# Altium PCB PCB-trb01-V2.30 - 2.PcbDoc (part 1 of 2)
Units mil, origin at the board's own origin, x right, y up, seen from the top; angles counter-clockwise.
Board outline 4312.6 x 590.55 mil, 4 copper layers (Top, GND, POWER, Bottom), stack 35.4 mil thick; 297 components, 117 nets, 641 pads, 0 vias.
Unrouted connection lines stored in the file: 1.
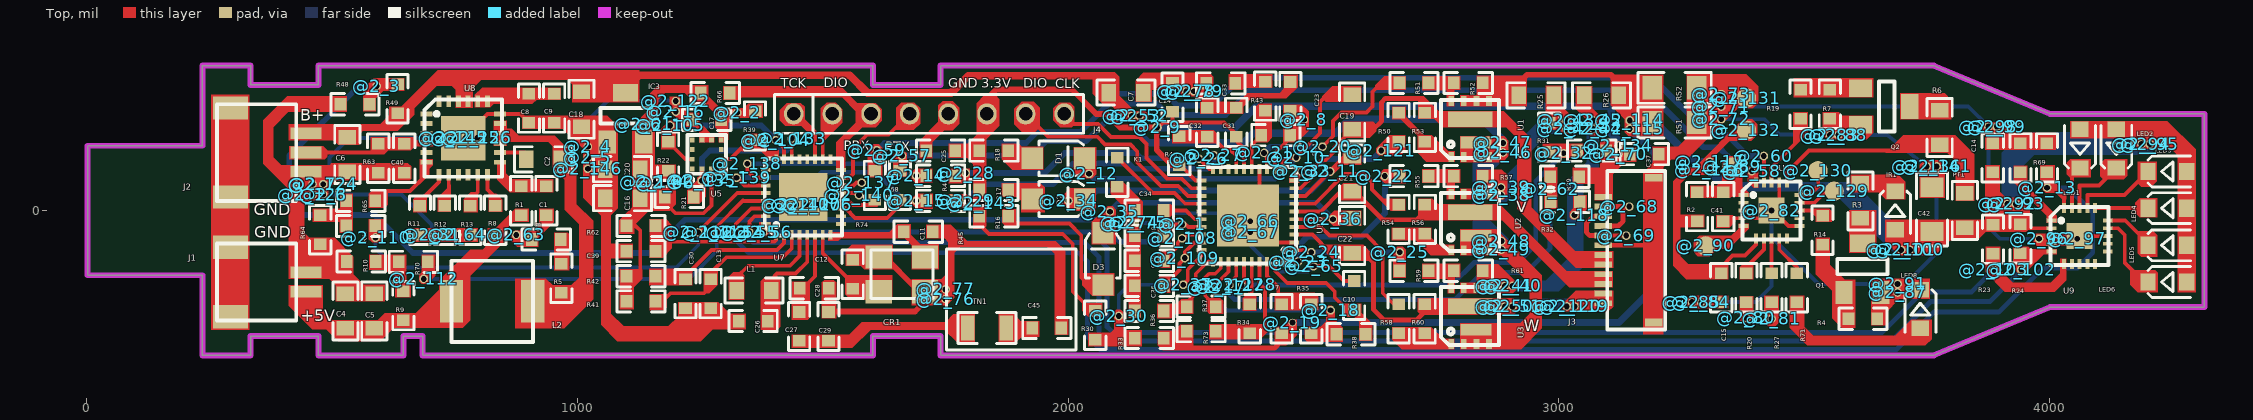
[diagram p0: Top view]
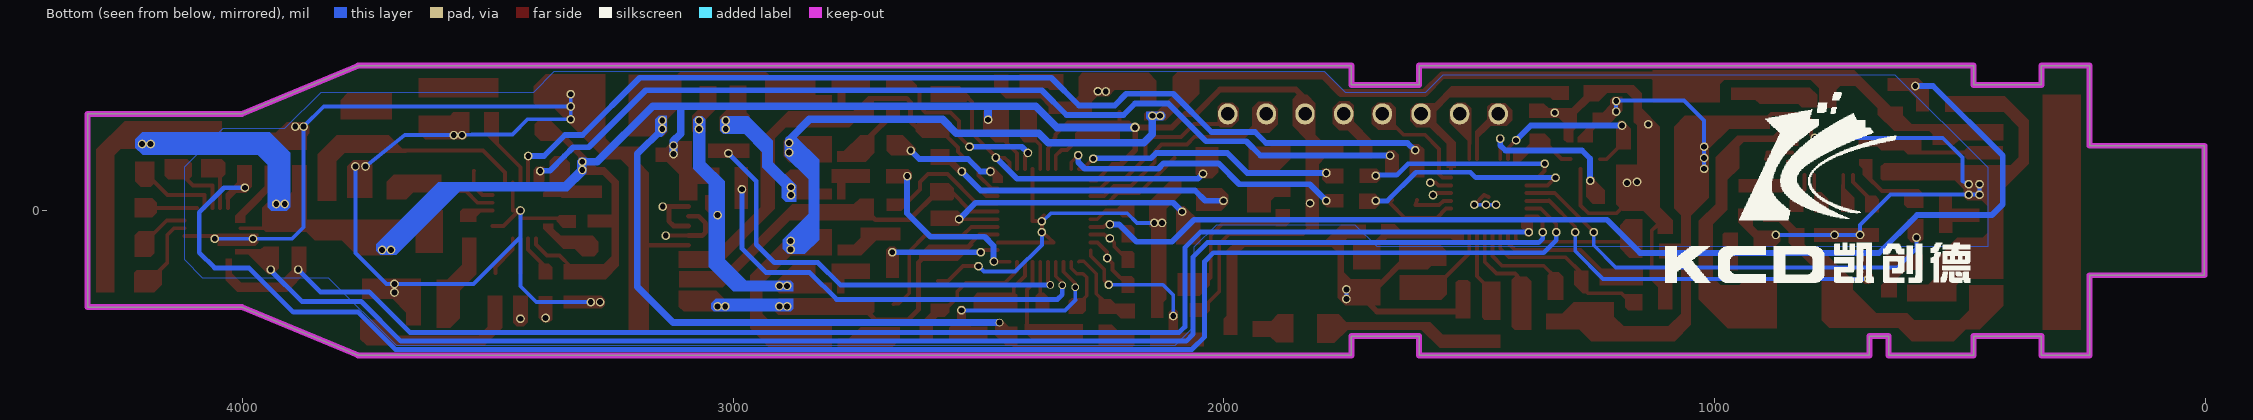
[diagram p1: Bottom view, seen from below]
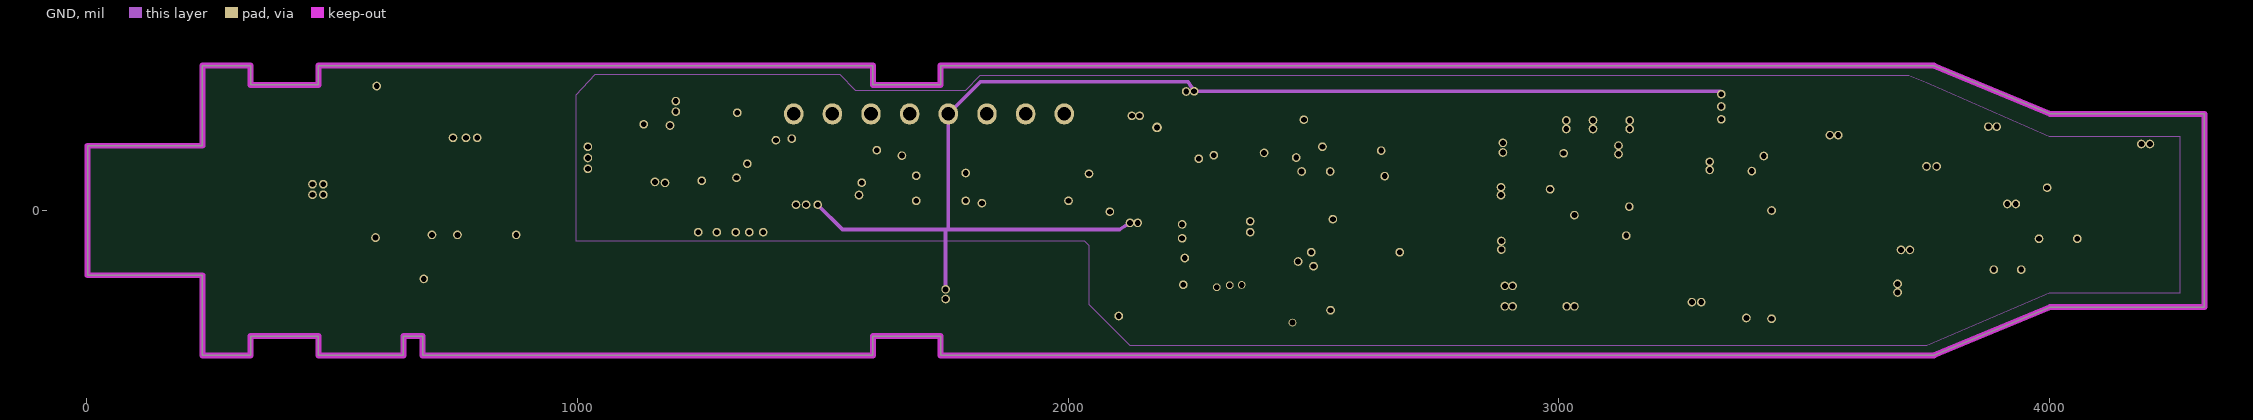
[diagram p2: GND]
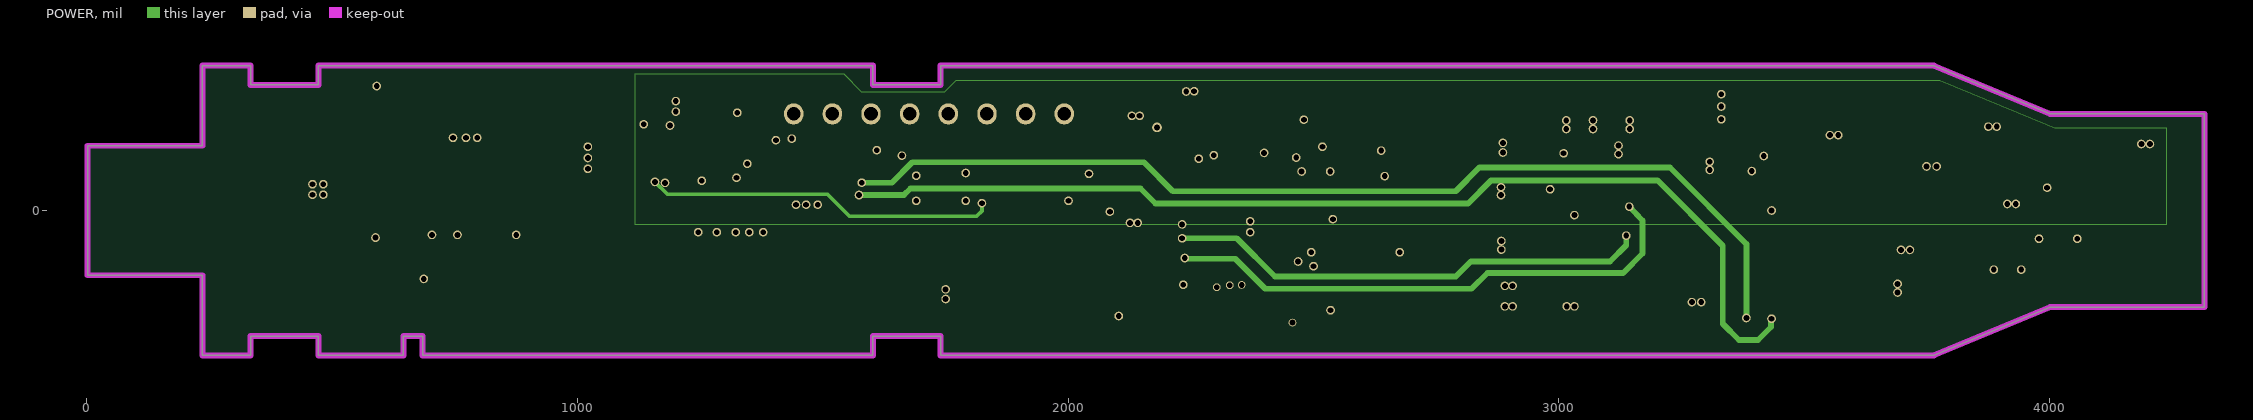
[diagram p3: POWER]

## Layer stack, top to bottom
Solder Mask Top: solder mask 0.4, Solder Resist, Dk 3.5
Top: signal copper 1.35
Dielectric 1: dielectric 10, FR-4, Dk 4.3
GND: signal copper 1.35
Dielectric2: dielectric 10, FR-4, Dk 4.3
POWER: signal copper 1.35
Dielectric3: dielectric 10, FR-4, Dk 4.3
Bottom: signal copper 1.35
Solder Mask Bottom: solder mask 0.4, Solder Resist, Dk 3.5

## Board outline
2.36,131.89 2.36,-131.89 236.22,-131.89 236.22,-295.28 334.65,-295.28 334.65,-255.91 472.44,-255.91 472.44,-295.28 645.67,-295.28 645.67,-255.91 685.04,-255.91 685.04,-295.28 1602.36,-295.28 1602.36,-255.91 1740.16,-255.91 1740.16,-295.28 3763.78,-295.28 4000,-196.85 4314.96,-196.85 4314.96,196.85 4000,196.85 3763.78,295.28 1740.16,295.28 1740.16,255.91 1602.36,255.91 1602.36,295.28 472.44,295.28 472.44,255.91 334.65,255.91 334.65,295.28 236.22,295.28 236.22,131.89

## Design rules (kind name [scope] priority, off if disabled: settings)
Clearance "Clearance - Default - DEFAULT - Via" [IsVia vs IsVia] p1: gap=7.87 ignorepadtopadclearanceinfootprint=FALSE
Clearance "Clearance - Default - DEFAULT- SMD" [IsVia vs IsSMTPin] p2: gap=7.87 ignorepadtopadclearanceinfootprint=FALSE
Clearance "Clearance - Default - DEFAULT - Net" [All] p3: gap=11.81 ignorepadtopadclearanceinfootprint=FALSE except(0: Arc-Hole Track-Hole SMDPad-Hole THPad-Hole Via-Hole Fill-Hole Poly-Hole Region-Hole Text-Hole; 10: Text-Text)
ComponentClearance "ComponentClearance - Default - DEFAULT" [All] p1: gap=6 collisioncheckmode=3 verticalgap=10 showdistances=FALSE
FanoutControl Fanout_SOIC [IsSOIC] p1: bgadir=Out bgaviamode=Centered fanoutstyle=Auto fanoutdirection=Alternating viagrid=1 // Fanout_SOIC (Default Rule)
FanoutControl Fanout_Small [(CompPinCount < 5)] p2: bgadir=Out bgaviamode=Centered fanoutstyle=Auto fanoutdirection=OutThenIn viagrid=1 // Fanout_Small (Default Rule)
FanoutControl Fanout_LCC [IsLCC] p3: bgadir=Out bgaviamode=Centered fanoutstyle=Auto fanoutdirection=Alternating viagrid=1 // Fanout_LCC (Default Rule)
FanoutControl Fanout_BGA [IsBGA] p4: bgadir=Out bgaviamode=Centered fanoutstyle=Auto fanoutdirection=Alternating viagrid=1 // Fanout_BGA (Default Rule)
HoleToHoleClearance "HoleToHoleClearance - Default - DEFAULT" [All] p1: gap=6 allowstackedmicrovias=TRUE
Length "Default Length" [All] p1: maxlimit=50000 minlimit=0
MaxMinImpedance "Default Impedance" [All] p1: minimum=50.00 maximum=150.0
ParallelSegment "Default Parallel Segment Same Layer" [All] p1: limit=1000 gap=200
ParallelSegment "Default Parallel Segment Adjasent" [All] p2: limit=1000 gap=200
RoutingLayers "RoutingLayers - Default - DEFAULT" [All] p1: top layer_v5=TRUE mid layer 1_v5=TRUE mid layer 2_v5=TRUE bottom layer_v5=TRUE
RoutingPriority "RoutingPriority - Default - DEFAULT" [All] p1: routingpriority=3
RoutingTopology "Default Routing Topology" [All] p1: topology=Shortest
RoutingVias "RoutingVias - Default - DEFAULT" [All] p1: holewidth=37 width=55 viastyle="Through Hole" minholewidth=37 minwidth=55 maxholewidth=37 maxwidth=55
SMDToCorner "SMDToCorner - Default - DEFAULT" [All] p1: distance=78740
SolderMaskExpansion [All] p1: expansion=4 istentingtop=FALSE
Width "Default Width" [All] p1: maxlimit=59.06 minlimit=5.91 preferedwidth=7.87
18 further rules are at their usual default settings.

## Components (designator, comment, footprint, x,y, rotation, side; value= is the part's Value field where it differs from the comment)
@2_1 "FPAD_2DABAABA" FPAD_2DABAABA 2232.28,-28.35 r180 top
@2_2 "FPAD_2DABAAA" FPAD_2DABAAA 1325.98,199.21 r180 top
@2_3 "FPAD_2DABAAA" FPAD_2DABAAA 591.34,253.54 r180 top
@2_4 "FPAD_2DABAAA" FPAD_2DABAAA 1021.65,129.92 r180 top
@2_5 "FPAD_2DABAAA" FPAD_2DABAAA 1021.65,107.09 r180 top
@2_6 "FPAD_2DABAAA" FPAD_2DABAAA 482.68,32.28 r180 top
@2_7 "FPAD_2DABAAA" FPAD_2DABAAA 460.63,53.54 r180 top
@2_8 "FPAD_2DABAABA" FPAD_2DABAABA 2480.32,185.04 r180 top
@2_9 "FPAD_2DABAABAC" FPAD_2DABAABAC 2181.1,169.29 r180 top
@2_10 "FPAD_2DABAABA" FPAD_2DABAABA 2464.57,107.87 r180 top
@2_11 "FPAD_2DABAABA" FPAD_2DABAABA 2533.86,79.53 r180 top
@2_12 "FPAD_2DABAABA" FPAD_2DABAABA 2042.52,74.8 r180 top
@2_13 "FPAD_2DABAABA" FPAD_2DABAABA 3994.49,46.46 r180 top
@2_14 "FPAD_2DABAAA" FPAD_2DABAAA 1690.55,70.87 r180 top
@2_15 "FPAD_2DABAAA" FPAD_2DABAAA 1690.55,19.68 r180 top
@2_16 "FPAD_2DABAAA" FPAD_2DABAAA 1200.79,201.57 r180 top
@2_17 "FPAD_2DABAABAA" FPAD_2DABAABAA 2302.76,-156.3 r180 top
@2_18 "FPAD_2DABAABA" FPAD_2DABAABA 2534.65,-203.15 r180 top
@2_19 "FPAD_2DABAABAA" FPAD_2DABAABAA 2457.09,-228.35 r180 top
@2_20 "FPAD_2DABAABA" FPAD_2DABAABA 2518.11,129.92 r180 top
@2_21 "FPAD_2DABAABA" FPAD_2DABAABA 2399.21,117.32 r180 top
@2_22 "FPAD_2DABAABA" FPAD_2DABAABA 2644.88,70.08 r180 top
@2_23 "FPAD_2DABAABA" FPAD_2DABAABA 2468.5,-103.94 r180 top
@2_24 "FPAD_2DABAABA" FPAD_2DABAABA 2495.28,-85.04 r180 top
@2_25 "FPAD_2DABAABA" FPAD_2DABAABA 2675.59,-85.04 r180 top
@2_26 "FPAD_2DABAABA" FPAD_2DABAABA 2266.14,105.51 r180 top
@2_27 "FPAD_2DABAABA" FPAD_2DABAABA 2296.85,112.6 r180 top
@2_28 "FPAD_2DABAAA" FPAD_2DABAAA 1791.34,76.38 r180 top
@2_29 "FPAD_2DABAAA" FPAD_2DABAAA 1791.34,19.68 r180 top
@2_30 "FPAD_2DABAABA" FPAD_2DABAABA 2103.15,-214.96 r180 top
@2_31 "FPAD_2DABAAA" FPAD_2DABAAA 703.94,-49.61 r180 top
@2_32 "FPAD_2DABAABA" FPAD_2DABAABA 3009.45,116.54 r180 top
@2_33 "FPAD_2DABAABA" FPAD_2DABAABA 2475.59,79.53 r180 top
@2_34 "FPAD_2DABAABA" FPAD_2DABAABA 2000.79,19.68 r180 top
@2_35 "FPAD_2DABAABA" FPAD_2DABAABA 2085.04,-2.36 r180 top
@2_36 "FPAD_2DABAABA" FPAD_2DABAABA 2539.37,-17.72 r180 top
@2_37 "FPAD_2DABAABA" FPAD_2DABAABA 2234.65,-151.18 r180 top
@2_38 "FPAD_2DABAABA" FPAD_2DABAABA 2881.89,31.5 r180 top
@2_39 "FPAD_2DABAABA" FPAD_2DABAABA 2881.89,47.24 r180 top
@2_40 "FPAD_2DABAABA" FPAD_2DABAABA 2905.51,-153.54 r180 top
@2_41 "FPAD_2DABAABA" FPAD_2DABAABA 2889.76,-153.54 r180 top
@2_42 "FPAD_2DABAABA" FPAD_2DABAABA 3014.96,166.14 r180 top
@2_43 "FPAD_2DABAABA" FPAD_2DABAABA 3014.96,183.46 r180 top
@2_44 "FPAD_2DABAABA" FPAD_2DABAABA 3069.29,166.14 r180 top
@2_45 "FPAD_2DABAABA" FPAD_2DABAABA 3069.29,183.46 r180 top
@2_46 "FPAD_2DABAABA" FPAD_2DABAABA 2885.83,118.11 r180 top
@2_47 "FPAD_2DABAABA" FPAD_2DABAABA 2885.83,137.8 r180 top
@2_48 "FPAD_2DABAABA" FPAD_2DABAABA 2882.68,-62.2 r180 top
@2_49 "FPAD_2DABAABA" FPAD_2DABAABA 2882.68,-79.53 r180 top
@2_50 "FPAD_2DABAABA" FPAD_2DABAABA 2889.76,-195.28 r180 top
@2_51 "FPAD_2DABAABA" FPAD_2DABAABA 2905.51,-195.28 r180 top
@2_52 "FPAD_2DABAABA" FPAD_2DABAABA 2145.67,192.91 r180 top
@2_53 "FPAD_2DABAABA" FPAD_2DABAABA 2129.92,192.91 r180 top
@2_54 "FPAD_2DABAAA" FPAD_2DABAAA 1322.83,-44.09 r180 top
@2_55 "FPAD_2DABAAA" FPAD_2DABAAA 1350.39,-44.09 r180 top
@2_56 "FPAD_2DABAAA" FPAD_2DABAAA 1378.74,-44.09 r180 top
@2_57 "FPAD_2DABAABA" FPAD_2DABAABA 1661.42,111.81 r180 top
@2_58 "FPAD_2DABAABA" FPAD_2DABAABA 3392.91,80.32 r180 top
@2_59 "FPAD_2DABAABA" FPAD_2DABAABA 1610.24,122.83 r180 top
@2_60 "FPAD_2DABAABA" FPAD_2DABAABA 3417.32,111.02 r180 top
@2_61 "FPAD_2DABAABA" FPAD_2DABAABA 1135.43,175.59 r180 top
@2_62 "FPAD_2DABAABA" FPAD_2DABAABA 2981.89,43.31 r180 top
@2_63 "FPAD_2DABAAA" FPAD_2DABAAA 875.59,-49.61 r180 top
@2_64 "FPAD_2DABAAA" FPAD_2DABAAA 755.91,-49.61 r180 top
@2_65 "FPAD_2DABAABA" FPAD_2DABAABA 2500,-113.39 r180 top
@2_66 "FPAD_2DABAABA" FPAD_2DABAABA 2370.87,-22.05 r180 top
@2_67 "FPAD_2DABAABA" FPAD_2DABAABA 2370.87,-44.09 r180 top
@2_68 "FPAD_2DABAABA" FPAD_2DABAABA 3143.31,7.87 r180 top
@2_69 "FPAD_2DABAABA" FPAD_2DABAABA 3137.01,-51.18 r180 top
@2_70 "FPAD_2DABAABA" FPAD_2DABAABA 3121.26,114.96 r180 top
@2_71 "FPAD_2DABAABA" FPAD_2DABAABA 3330.71,211.81 r180 top
@2_72 "FPAD_2DABAABA" FPAD_2DABAABA 3330.71,185.83 r180 top
@2_73 "FPAD_2DABAABA" FPAD_2DABAABA 3330.71,237.01 r180 top
@2_74 "FPAD_2DABAABA" FPAD_2DABAABA 2125.98,-25.2 r180 top
@2_75 "FPAD_2DABAABA" FPAD_2DABAABA 2141.73,-25.2 r180 top
@2_76 "FPAD_2DABAABA" FPAD_2DABAABA 1750.39,-180.32 r180 top
@2_77 "FPAD_2DABAABA" FPAD_2DABAABA 1750.39,-160.63 r180 top
@2_78 "FPAD_2DABAABA" FPAD_2DABAABA 2240.55,242.52 r180 top
@2_79 "FPAD_2DABAABA" FPAD_2DABAABA 2256.69,242.91 r180 top
@2_80 "FPAD_2DABAABA" FPAD_2DABAABA 3381.89,-218.9 r180 top
@2_81 "FPAD_2DABAABA" FPAD_2DABAABA 3433.07,-220.47 r180 top
@2_82 "FPAD_2DABAABA" FPAD_2DABAABA 3433.07,0 r180 top
@2_83 "FPAD_2DABAABA" FPAD_2DABAABA 3551.97,153.54 r180 top
@2_84 "FPAD_2DABAABA" FPAD_2DABAABA 3289.76,-186.61 r180 top
@2_85 "FPAD_2DABAABA" FPAD_2DABAABA 3270.87,-186.61 r180 top
@2_86 "FPAD_2DABAABA" FPAD_2DABAABA 1178.74,56.3 r180 top
@2_87 "FPAD_2DABAABA" FPAD_2DABAABA 3689.76,-166.93 r180 top
@2_88 "FPAD_2DABAABA" FPAD_2DABAABA 3568.9,153.54 r180 top
@2_89 "FPAD_2DABAABAB" FPAD_2DABAABAB 3352.76,88.98 r180 top
@2_90 "FPAD_2DABAABAB" FPAD_2DABAABAB 3298.82,-72.05 r180 top
@2_91 "FPAD_2DABAABA" FPAD_2DABAABA 3689.76,-149.61 r180 top
@2_92 "FPAD_2DABAABA" FPAD_2DABAABA 3913.39,13.39 r180 top
@2_93 "FPAD_2DABAABA" FPAD_2DABAABA 3930.71,13.39 r180 top
@2_94 "FPAD_2DABAABA" FPAD_2DABAABA 4186.61,135.43 r180 top
@2_95 "FPAD_2DABAABA" FPAD_2DABAABA 4203.94,135.43 r180 top
@2_96 "FPAD_2DABAABA" FPAD_2DABAABA 3977.95,-57.48 r180 top
@2_97 "FPAD_2DABAABA" FPAD_2DABAABA 4055.91,-57.48 r180 top
@2_98 "FPAD_2DABAABA" FPAD_2DABAABA 3874.8,170.87 r180 top
@2_99 "FPAD_2DABAABA" FPAD_2DABAABA 3891.73,170.87 r180 top
@2_100 "FPAD_2DABAABA" FPAD_2DABAABA 3714.96,-80.32 r180 top
@2_101 "FPAD_2DABAABA" FPAD_2DABAABA 3696.85,-80.32 r180 top
@2_102 "FPAD_2DABAABA" FPAD_2DABAABA 3941.73,-120.47 r180 top
@2_103 "FPAD_2DABAABA" FPAD_2DABAABA 3885.83,-120.47 r180 top
@2_104 "FPAD_2DABAABA" FPAD_2DABAABA 1404.72,143.31 r180 top
@2_105 "FPAD_2DABAABA" FPAD_2DABAABA 1188.98,173.23 r180 top
@2_106 "FPAD_2DABAABA" FPAD_2DABAABA 1489.76,11.81 r180 top
@2_107 "FPAD_2DABAABA" FPAD_2DABAABA 1466.14,11.81 r180 top
@2_108 "FPAD_2DABAABA" FPAD_2DABAABA 2232.28,-56.69 r180 top
@2_109 "FPAD_2DABAABA" FPAD_2DABAABA 2237.8,-96.85 r180 top
@2_110 "FPAD_2DABAAA" FPAD_2DABAAA 588.98,-55.12 r180 top
@2_111 "FPAD_2DABAAA" FPAD_2DABAAA 1246.46,-44.09 r180 top
@2_112 "FPAD_2DABAAA" FPAD_2DABAAA 687.4,-139.37 r180 top
@2_113 "FPAD_2DABAAA" FPAD_2DABAAA 1284.25,-44.09 r180 top
@2_114 "FPAD_2DABAABA" FPAD_2DABAABA 3144.09,183.46 r180 top
@2_115 "FPAD_2DABAABA" FPAD_2DABAABA 3144.09,166.14 r180 top
@2_116 "FPAD_2DABAABA" FPAD_2DABAABA 3307.09,82.68 r180 top
@2_117 "FPAD_2DABAABA" FPAD_2DABAABA 3307.09,99.21 r180 top
@2_118 "FPAD_2DABAABA" FPAD_2DABAABA 3031.5,-9.45 r180 top
@2_119 "FPAD_2DABAABA" FPAD_2DABAABA 3031.5,-195.28 r180 top
@2_120 "FPAD_2DABAABA" FPAD_2DABAABA 3015.75,-195.28 r180 top
@2_121 "FPAD_2DABAABA" FPAD_2DABAABA 2637.8,122.05 r180 top
@2_122 "FPAD_2DABAAA" FPAD_2DABAAA 1200.79,222.83 r180 top
@2_123 "FPAD_2DABAAA" FPAD_2DABAAA 460.63,32.28 r180 top
@2_124 "FPAD_2DABAAA" FPAD_2DABAAA 482.68,53.54 r180 top
@2_125 "FPAD_2DABAAA" FPAD_2DABAAA 773.23,148.03 r180 top
@2_126 "FPAD_2DABAAA" FPAD_2DABAAA 796.06,148.03 r180 top
@2_127 "FPAD_2DABAABAA" FPAD_2DABAABAA 2329.13,-152.36 r180 top
@2_128 "FPAD_2DABAABAA" FPAD_2DABAABAA 2353.54,-151.57 r180 top
@2_129 "FPAD_2DABAABAB" FPAD_2DABAABAB 3560.63,39.37 r180 top
@2_130 "FPAD_2DABAABAB" FPAD_2DABAABAB 3527.56,81.1 r180 top
@2_131 "FPAD_2DABAABAB" FPAD_2DABAABAB 3381.89,229.13 r180 top
@2_132 "FPAD_2DABAABAB" FPAD_2DABAABAB 3381.89,163.78 r180 top
@2_133 "FPAD_2DABAAA" FPAD_2DABAAA 1437.01,146.46 r180 top
@2_134 "FPAD_2DABAABA" FPAD_2DABAABA 3121.26,132.28 r180 top
@2_135 "FPAD_2DABAAA" FPAD_2DABAAA 1253.54,60.63 r180 top
@2_136 "FPAD_2DABAABA" FPAD_2DABAABA 3748.82,89.76 r180 top
@2_137 "FPAD_2DABAAA" FPAD_2DABAAA 1579.53,56.69 r180 top
@2_138 "FPAD_2DABAAA" FPAD_2DABAAA 1346.46,95.28 r180 top
@2_139 "FPAD_2DABAAA" FPAD_2DABAAA 1324.41,66.93 r180 top
@2_140 "FPAD_2DABAAA" FPAD_2DABAAA 1574.02,31.5 r180 top
@2_141 "FPAD_2DABAABA" FPAD_2DABAABA 3769.29,89.76 r180 top
@2_142 "FPAD_2DABAAA" FPAD_2DABAAA 1445.67,11.81 r180 top
@2_143 "FPAD_2DABAAA" FPAD_2DABAAA 1824.41,14.96 r180 top
@2_144 "FPAD_2DABAABA" FPAD_2DABAABA 1158.27,58.27 r180 top
@2_145 "FPAD_2DABAAA" FPAD_2DABAAA 746.85,148.03 r180 top
@2_146 "FPAD_2DABAAA" FPAD_2DABAAA 1021.65,85.04 r180 top
C1 "0402" 0402 937.01,19.68 r90 top
C2 "0603" 0603 931.1,104.33 r0 top
C3 "0402" 0402 937.01,-59.06 r0 top
C4 "0603" 0603 527.56,-204.72 r90 top
C5 "0603" 0603 586.61,-204.72 r90 top
C6 "0603" 0603 531.5,114.17 r270 top
C7 "0603" 0603 2118.11,240.16 r0 top
C8 "0402" 0402 901.57,208.66 r90 top
C9 "0402" 0402 952.76,208.66 r90 top
C10 "0402" 0402 2582.68,-173.23 r90 top
C11 "0402" 0402 1694.88,-43.31 r0 top
C12 "0402" 0402 1561.02,-129.92 r90 top
C13 "0402" 0402 1271.65,-169.29 r270 top
C14 "0402" 0402 3883.86,107.09 r270 top
C15 "0402" 0402 3330.71,-157.48 r270 top
C16 "0603" 0603 1092.52,25.2 r180 top
C17 "0402" 0402 1263.78,185.04 r180 top
C18 "0603" 0603 1008.66,206.3 r90 top
C19 "0603" 0603 2578.74,200.79 r270 top
C20 "0603" 0603 1092.52,84.25 r180 top
C21 "0603" 0603 2578.74,74.8 r270 top
C22 "0603" 0603 2578.74,-51.18 r270 top
C23 "0402" 0402 2452.76,232.28 r270 top
C24 "0402" 0402 2212.6,230.71 r270 top
C25 "0402" 0402 1740.16,122.05 r180 top
C26 "0402" 0402 1358.27,-225.2 r180 top
C27 "0402" 0402 1451.97,-236.22 r270 top
C28 "0402" 0402 1482.68,-158.27 r0 top
C29 "0402" 0402 1511.81,-236.22 r90 top
C30 "0402" 0402 1220.47,-169.29 r270 top
C31 "0402" 0402 2342.52,179.53 r270 top
C32 "0402" 0402 2283.46,179.53 r270 top
C33 "0402" 0402 2311.02,259.06 r0 top
C34 "0402" 0402 2165.35,0 r0 top
C35 "0402" 0402 2165.35,-102.36 r0 top
C36 "0402" 0402 2165.35,-153.54 r0 top
C37 "0402" 0402 3174.02,114.96 r0 top
C38 "0402" 0402 2165.35,-51.18 r180 top
C39 "0402" 0402 1129.92,-82.68 r180 top
C40 "0402" 0402 647.64,106.3 r90 top
C41 "0402" 0402 3334.65,7.87 r90 top
C42 "0805-2" 0805-2 3759.84,2.36 r90 top
C45 "0402" 0402 1956.69,-239.37 r0 top
CR1 "CRESTAL-24M-SMD" CRESTAL-24M-SMD 1661.42,-129.92 r0 top
D1 "SOD-323-S4" SOD-323-S4 1980.32,106.3 r180 top
D2 "SOD-323-S4" SOD-323-S4 1980.32,23.62 r180 top
D3 "SOD-323-S4" SOD-323-S4 2070.87,-98.43 r270 top
IC3 "SOT-23A" SOT-23A 1059.06,149.61 r0 top
IR1 "LED-1" LED-1 3685.04,0 r180 top
J1 "X1002WRS-2PIN" X1002WRS-2PIN 447.24,-145.67 r180 top
J2 "X1002WRS-3PIN" X1002WRS-3PIN 447.24,118.11 r180 top
J3 "FPC-05-09-12RLTAG" FPC-05-09-12RLTAG 3090.55,-80.71 r0 top
J4 "PIN2.0X8-S" PIN2.0X8-S 1716.54,196.85 r0 top
K1 "0402" 0402 2100,77.56 r90 top
L1 "0603" 0603 1359.84,-162.99 r0 top
L2 "INDUCTANCE-4X4-SMD" INDUCTANCE-4X4-SMD 826.77,-185.04 r180 top
LED1 "LED-1" LED-1 4061.42,125.98 r0 top
LED2 "LED-1" LED-1 4135.43,125.98 r0 top
LED3 "LED-1" LED-1 4239.37,79.53 r270 top
LED4 "LED-1" LED-1 4239.37,4.72 r270 top
LED5 "LED-1" LED-1 4239.37,-70.87 r270 top
LED6 "LED-1" LED-1 4239.37,-145.67 r270 top
LED8 "LED-1" LED-1 3736.22,-200.79 r180 top
PT1 "0603B" 0603B 3826.77,0 r90 top
Q1 "SOT-23" SOT-23 3578.74,-157.48 r0 top
Q2 "SOT-23" SOT-23 3624.41,251.18 r270 top
R1 "0402" 0402 885.83,19.68 r90 top
R2 "0402" 0402 3281.5,7.87 r90 top
R3 "0603" 0603 3614.17,19.68 r90 top
R4 "0402" 0402 3619.29,-220.47 r180 top
R5 "0402" 0402 967.72,-137.8 r270 top
R6 "0603" 0603 3775.59,169.29 r270 top
R7 "0402" 0402 3551.97,216.54 r270 top
R8 "0402" 0402 833.07,-19.68 r90 top
R9 "0402" 0402 645.67,-193.7 r90 top
R10 "0402" 0402 559.84,-103.94 r180 top
R11 "0402" 0402 679.53,-19.68 r90 top
R12 "0402" 0402 729.92,-19.68 r90 top
R13 "0402" 0402 781.89,-19.68 r90 top
R14 "0402" 0402 3537.01,-40.16 r270 top
R15 "0402" 0402 3940.16,107.09 r90 top
R16 "0402" 0402 1848.82,-11.81 r0 top
R17 "0402" 0402 1848.82,41.73 r0 top
R18 "0402" 0402 1848.82,122.05 r0 top
R19 "0402" 0402 3492.13,216.54 r90 top
R20 "0402" 0402 3381.89,-157.48 r90 top
R21 "0402" 0402 1207.87,27.56 r180 top
R22 "0402" 0402 1185.04,110.24 r270 top
R23 "0402" 0402 3884.25,-58.27 r90 top
R24 "0402" 0402 3940.16,-57.48 r90 top
R25 "0603" 0603 2953.54,234.65 r180 top
R26 "0603" 0603 3086.61,234.65 r0 top
R27 "0402" 0402 3433.07,-157.48 r90 top
R28 "0402" 0402 3066.93,122.05 r180 top
R29 "0402" 0402 3011.81,68.9 r180 top
R30 "0402" 0402 2055.12,-233.86 r270 top
R31 "0402" 0402 2980.32,149.61 r270 top
R32 "0402" 0402 3012.6,17.72 r180 top
R33 "0402" 0402 2165.35,-259.84 r180 top
R34 "0402" 0402 2370.08,-220.47 r90 top
R35 "0402" 0402 2495.28,-220.47 r90 top
R36 "0402" 0402 2165.35,-204.72 r180 top
R37 "0402" 0402 2270.87,-196.06 r0 top
R38 "0402" 0402 2576.38,-251.97 r0 top
R39 "0402" 0402 1362.2,172.44 r90 top
R40 "0402" 0402 2226.38,122.05 r90 top
R41 "0402" 0402 1129.92,-185.04 r0 top
R42 "0402" 0402 1129.92,-133.86 r0 top
R43 "0402" 0402 2401.57,233.07 r90 top
R44 "0402" 0402 2423.23,153.54 r180 top
R45 "0402" 0402 1740.16,19.68 r180 top
R46 "0402" 0402 1740.16,70.87 r180 top
R47 "0402" 0402 559.06,-31.5 r180 top
R48 "0402" 0402 547.24,216.54 r180 top
R49 "0402" 0402 633.86,227.56 r270 top
R50 "0402" 0402 2673.23,169.29 r270 top
R51 "0402" 0402 2704.72,259.84 r180 top
R52 "0402" 0402 2814.96,259.84 r180 top
R53 "0402" 0402 2726.77,169.29 r90 top
R54 "0402" 0402 2673.23,-18.11 r90 top
R55 "0402" 0402 2704.72,70.08 r180 top
R56 "0402" 0402 2726.77,-18.11 r270 top
R57 "0402" 0402 2814.96,70.08 r0 top
R58 "0402" 0402 2673.23,-220.47 r90 top
R59 "0402" 0402 2704.72,-122.83 r180 top
R60 "0402" 0402 2726.38,-220.47 r90 top
R61 "0402" 0402 2814.96,-122.83 r0 top
R62 "0402" 0402 1129.92,-31.5 r0 top
R63 "0402" 0402 594.49,106.3 r270 top
R64 "0402" 0402 476.38,-39.37 r90 top
R65 "0402" 0402 559.06,19.68 r0 top
R66 "0402" 0402 1281.1,239.37 r180 top
R67 "0402" 0402 2435.04,-220.47 r90 top
R68 "0402" 0402 1657.48,51.18 r90 top
R69 "0402" 0402 3994.09,107.09 r270 top
R70 "0402" 0402 666.14,-104.72 r0 top
R71 "0402" 0402 3484.25,-157.48 r90 top
R73 "0402" 0402 2270.87,-245.67 r0 top
R74 "0402" 0402 1606.3,51.18 r90 top
RS1 "0805-2" 0805-2 3235.43,179.13 r0 top
RS2 "0805-2" 0805-2 3235.43,250 r0 top
TN1 "0603A" 0603A 1834.65,-239.37 r0 top
U1 "DFN-8L-3X3-DOUB-MOS-INS" DFN-8L-3X3-DOUB-MOS-INS 2818.9,166.14 r90 top
U2 "DFN-8L-3X3-DOUB-MOS-INS" DFN-8L-3X3-DOUB-MOS-INS 2818.9,-23.62 r90 top
U3 "DFN-8L-3X3-DOUB-MOS-INS" DFN-8L-3X3-DOUB-MOS-INS 2818.9,-214.96 r90 top
U4 "QFN20L-3X3-P-INSIDEA" QFN20L-3X3-P-INSIDEA 3433.07,0 r0 top
U5 "LGA-12-2X2" LGA-12-2X2 1263.78,114.17 r90 top
U7 "QFN32-4X4-PIN-D-0.4" QFN32-4X4-PIN-D-0.4 1460.63,27.56 r90 top
U8 "QFN24-4X4-DPIN-0.5" QFN24-4X4-DPIN-0.5 767.72,147.64 r0 top
U9 "QFN20L-3X3-P-INSIDE" QFN20L-3X3-P-INSIDE 4060.63,-51.97 r0 top
U10 "QFN40-5X5-DPIN-0.4" QFN40-5X5-DPIN-0.4 2366.14,-9.84 r180 top

## Footprints (in the part's own frame and the unit in brackets; to place one, negate y for a bottom-side part, rotate by r counter-clockwise, add the part's x,y. Pads: shape width x height; smd on the part's side, far side on the other; paste and mask are expansions set on the pad)
0402 [mm]
  rect 0.6x0.65 smd: 1(-0.75,0) 2(0.75,0)
  silkscreen extent -1.25,-0.55 1.25,0.55
0603 [mm]
  rect 0.75x0.9 smd: 1(-0.9,0) 2(0.9,0)
  silkscreen extent -1.5,-0.65 1.5,0.65
0603A [mm]
  rect 0.7x1.3 smd: 1(-1,0) 2(1,0)
  silkscreen extent -1.5,-0.8 1.5,0.8
0603B [mm]
  rect 0.75x0.9 smd: 1(-0.9,0) 2(0.9,0)
  silkscreen extent -1.5,-0.65 1.5,0.65
0805-2 [mm]
  rect 1x1.2 smd: 1(-1.15,0) 2(1.15,0)
  silkscreen extent -1.9,-0.8 1.9,0.8
CRESTAL-24M-SMD [mm]
  rect 1.35x1.2 smd: 1(-1.2,-0.9) 2(1.2,-0.9) 3(1.2,0.9) 4(-1.2,0.9)
  silkscreen extent -1.6,-1.25 1.6,1.25
DFN-8L-3X3-DOUB-MOS-INS [mm]
  rect 0.5x0.3 smd: 1(-1.45,0.975) 2(-1.45,0.325) 3(-1.45,-0.325) 4(-1.45,-0.975) 5(1.45,-0.975) 6(1.45,-0.325) 7(1.45,0.325) 8(1.45,0.975)
  rect 0.8x2.3 smd: 9(0.5,0)
  rect 0.6x1.6 smd: 10(-0.7,-0.3)
  silkscreen extent -1.5,-1.5 1.5,1.5
FPAD_2DABAAA [mm]
  round 0.45 hole 0.3: 1(0,0)
FPAD_2DABAABA [mm]
  round 0.45 hole 0.3: 1(0,0)
FPAD_2DABAABAA [mm]
  round 0.4 hole 0.3: 1(0,0)
FPAD_2DABAABAB [mm]
  round 1 smd: 1(0,0)
FPAD_2DABAABAC [mm]
  round 0.5 hole 0.3: 1(0,0)
FPC-05-09-12RLTAG [mm]
  rect 0.9x0.3 smd: 1(0,2.75) 2(0,2.25) 3(0,1.75) 4(0,1.25) 5(0,0.75) 6(0,0.25) 7(0,-0.25) 8(0,-0.75) 9(0,-1.25) 10(0,-1.75) 11(0,-2.25) 12(0,-2.75)
  rect 0.9x0.4 smd: 13(2.6,-3.75) 14(2.6,3.75)
  silkscreen extent 0.2,-4.1 3.2,4.1
INDUCTANCE-4X4-SMD [mm]
  rect 1.2x2.2 smd: 1(-2.1,0) 2(2.1,0)
  silkscreen extent -2.1,-2.1 2.1,2.1
LED-1 [mm]
  rect 0.9x0.8 smd: 1(0,1) 2(0,-1)
  silkscreen extent -0.8,-1 0.8,1.2
LGA-12-2X2 [mm]
  rect 0.25x0.25 smd: 1(-0.75,0.75) 2(-0.75,0.25) 3(-0.75,-0.25) 4(-0.75,-0.75) 5(-0.25,-0.75) 6(0.25,-0.75) 7(0.75,-0.75) 8(0.75,-0.25) 9(0.75,0.25) 10(0.75,0.75) 11(0.25,0.75) 12(-0.25,0.75)
  silkscreen extent -1.42,-1 1,1
PIN2.0X8-S [mm]
  oval 1x1.1 hole 0.7: 1(-7,0) 2(-5,0) 3(-3,0) 4(-1,0) 5(1,0) 6(3,0) 7(5,0) 8(7,0)
  silkscreen extent -8,-1 8,1
QFN20L-3X3-P-INSIDE [mm]
  rect 0.5x0.2 smd: 1(-1.45,0.8) 2(-1.45,0.4) 3(-1.45,0) 4(-1.45,-0.4) 5(-1.45,-0.8) 11(1.45,-0.8) 12(1.45,-0.4) 13(1.45,0) 14(1.45,0.4) 15(1.45,0.8)
  rect 0.2x0.5 smd: 6(-0.8,-1.45) 7(-0.4,-1.45) 8(0,-1.45) 9(0.4,-1.45) 10(0.8,-1.45) 16(-0.8,1.45) 17(-0.4,1.45) 18(0,1.45) 19(0.4,1.45) 20(0.8,1.45)
  rect 1.35x1.35 smd: 21(0,0)
  silkscreen extent -1.5,-1.5 1.5,1.5
QFN20L-3X3-P-INSIDEA [mm]
  rect 0.5x0.2 smd: 1(-1.45,0.8) 2(-1.45,0.4) 3(-1.45,0) 4(-1.45,-0.4) 5(-1.45,-0.8) 11(1.45,-0.8) 12(1.45,-0.4) 13(1.45,0) 14(1.45,0.4) 15(1.45,0.8)
  rect 0.2x0.5 smd: 6(-0.8,-1.45) 7(-0.4,-1.45) 8(0,-1.45) 9(0.4,-1.45) 10(0.8,-1.45) 16(-0.8,1.45) 17(-0.4,1.45) 18(0,1.45) 19(0.4,1.45) 20(0.8,1.45)
  rect 1.35x1.35 smd: 21(0,0)
  silkscreen extent -1.5,-1.5 1.5,1.5
QFN24-4X4-DPIN-0.5 [mm]
  rect 0.6x0.25 smd: 1(-1.9,1.25) 2(-1.9,0.75) 3(-1.9,0.25) 4(-1.9,-0.25) 5(-1.9,-0.75) 6(-1.9,-1.25) 13(1.9,-1.25) 14(1.9,-0.75) 15(1.9,-0.25) 16(1.9,0.25) 17(1.9,0.75) 18(1.9,1.25)
  rect 0.25x0.6 smd: 7(-1.25,-1.9) 8(-0.75,-1.9) 9(-0.25,-1.9) 10(0.25,-1.9) 11(0.75,-1.9) 12(1.25,-1.9) 19(1.25,1.9) 20(0.75,1.9) 21(0.25,1.9) 22(-0.25,1.9) 23(-0.75,1.9) 24(-1.25,1.9)
  rrect0% 2.3x2.3 smd: 25(0,0)
  silkscreen extent -2,-2 2,2
QFN32-4X4-PIN-D-0.4 [mm]
  rect 0.5x0.2 smd: 1(-1.95,1.4) 2(-1.95,1) 3(-1.95,0.6) 4(-1.95,0.2) 5(-1.95,-0.2) 6(-1.95,-0.6) 7(-1.95,-1) 8(-1.95,-1.4) 17(1.95,-1.4) 18(1.95,-1) 19(1.95,-0.6) 20(1.95,-0.2) 21(1.95,0.2) 22(1.95,0.6) 23(1.95,1) 24(1.95,1.4)
  rect 0.2x0.5 smd: 9(-1.4,-1.95) 10(-1,-1.95) 11(-0.6,-1.95) 12(-0.2,-1.95) 13(0.2,-1.95) 14(0.6,-1.95) 15(1,-1.95) 16(1.4,-1.95) 25(1.4,1.95) 26(1,1.95) 27(0.6,1.95) 28(0.2,1.95) 29(-0.2,1.95) 30(-0.6,1.95) 31(-1,1.95) 32(-1.4,1.95)
  rrect0% 2.5x2.5 smd: 33(0,0)
  silkscreen extent -2,-2 2,2
QFN40-5X5-DPIN-0.4 [mm]
  rect 0.5x0.2 smd: 1(-2.4,1.8) 2(-2.4,1.4) 3(-2.4,1) 4(-2.4,0.6) 5(-2.4,0.2) 6(-2.4,-0.2) 7(-2.4,-0.6) 8(-2.4,-1) 9(-2.4,-1.4) 10(-2.4,-1.8) 21(2.4,-1.8) 22(2.4,-1.4) 23(2.4,-1) 24(2.4,-0.6) 25(2.4,-0.2) 26(2.4,0.2) 27(2.4,0.6) 28(2.4,1) 29(2.4,1.4) 30(2.4,1.8)
  rect 0.2x0.5 smd: 11(-1.8,-2.4) 12(-1.4,-2.4) 13(-1,-2.4) 14(-0.6,-2.4) 15(-0.2,-2.4) 16(0.2,-2.4) 17(0.6,-2.4) 18(1,-2.4) 19(1.4,-2.4) 20(1.8,-2.4) 31(1.8,2.4) 32(1.4,2.4) 33(1,2.4) 34(0.6,2.4) 35(0.2,2.4) 36(-0.2,2.4) 37(-0.6,2.4) 38(-1,2.4) 39(-1.4,2.4) 40(-1.8,2.4)
  rrect0% 3.2x3.2 smd: 41(0,0)
  silkscreen extent -2.5,-2.5 2.5,2.5
SOD-323-S4 [mm]
  rect 1.1x1.1 smd: 1(-1.35,0) 2(1.35,0)
  silkscreen extent -1.3,-0.9 1,0.9
SOT-23 [mm]
  rect 0.9x1.2 smd: 1(0.05,-0.25) 2(1.95,-0.25)
  rect 1.3x0.9 smd: 3(1,2.3)
  silkscreen extent -0.3,0.7 2.3,1.5
SOT-23A [mm]
  rect 0.9x1.2 smd: 1(0.05,-0.25) 2(1.95,-0.25)
  rect 1.3x0.9 smd: 3(1,2.3)
  silkscreen extent -0.3,0.7 2.3,1.5
X1002WRS-2PIN [mm]
  rect 1.6x0.6 smd: 1(0,0.5) 2(0,-0.5)
  rect 1.8x1.2 smd: 3(3.9,-1.8) 4(3.9,1.8)
  silkscreen extent 0.5,-2 4.6,2
X1002WRS-3PIN [mm]
  rect 1.6x0.6 smd: 1(0,1) 2(0,0) 3(0,-1)
  rect 1.8x1.2 smd: 4(3.9,-2.3) 5(3.9,2.3)
  silkscreen extent 0.5,-2.5 4.6,2.5

## Nets (pads, with @x,y where several pads share a name; then routed paths per layer and width w, separated by ;. In a path a pad name is that pad's centre, name@x,y a point inside that pad or via, vN(x,y) a via of type N, cw(c..) or ccw(c..) an arc to the next point about the centre after c; other vN are vias at no path point)
$$$1: C4.1 C5.1 J1.1 L2.2 R1.1 R8.1 R9.1 | length 660.7
  Top w7.87: J1.1@447.24,-165.35 447.24,-207.87 472.44,-233.07 532.28,-233.07 C4.1@527.56,-240.16 C5.1@586.61,-240.16 586.61,-239.76 603.15,-223.23 R9.1@645.67,-223.23 743.31,-223.23 743.31,-185.83 L2.2@744.09,-185.04 744.09,-138.58 793.7,-88.98 811.81,-88.98 833.07,-67.72 R8.1@833.07,-49.21 871.26,-11.02 885.43,-11.02 R1.1@885.83,-9.84
$$$2: C8.2 C9.2 U8.19 U8.20 | length 177.2
  Top w7.87: U8.20@797.24,222.44 U8.19@816.93,222.44 896.06,222.44 909.45,235.83 C8.2@901.57,238.19 C9.2@952.76,238.19
$$$3: C2.2 L2.1 R5.2 U8.15 U8.16 U8.17 | length 615.3
  Top w7.87: U8.15@842.52,137.8 U8.16@842.52,157.48 ; U8.17@842.52,177.17 U8.16@842.52,157.48 ; L2.1@909.45,-185.04 968.5,-185.04 968.5,-172.83 R5.2@967.72,-167.32 968.5,-166.54 1005.51,-166.54 1022.83,-149.21 1022.83,-24.41 989.76,8.66 989.76,66.14 966.93,88.98 966.93,103.94 C2.2@966.54,104.33 966.54,127.56 947.05,147.05 879.72,147.05 869.29,157.48 U8.16@842.52,157.48
$$$4: C2.1 U8.14 | length 65
  Top w7.87: U8.14@842.52,118.11 892.91,118.11 892.13,117.32 C2.1@895.67,104.33
$$$5: C1.2 R1.2 U8.13 | length 131.8
  Top w7.87: U8.13@842.52,98.43 842.52,70.08 863.78,48.82 885.43,48.82 R1.2@885.83,49.21 C1.2@937.01,49.21
$$$6: R11.2 U8.7 | length 79.1
  Top w7.87: R11.2@679.53,9.84 688.98,19.29 688.98,28.74 718.11,57.87 718.11,72.44 U8.7@718.5,72.83
$$$7: R12.2 U8.8 | length 66.4
  Top w7.87: R12.2@729.92,9.84 729.92,28.35 738.19,36.61 U8.8@738.19,72.83
$$$8: R13.2 U8.11 | length 69.4
  Top w7.87: R13.2@781.89,9.84 781.89,22.44 797.24,37.8 U8.11@797.24,72.83
$$$9: C32.2 R40.2 U10.17 | length 159.8
  Top w7.87: R40.2@2226.38,151.57 2281.89,151.57 C32.2@2283.46,150 2292.52,150 2319.29,123.23 2331.1,123.23 2342.52,111.81 U10.17@2342.52,84.65
$$$10: J4.8 U10.22 | length 358.9
  Top w7.87: J4.8@1992.13,196.85 2012.6,176.38 2060.63,176.38 2087.01,150 2145.28,150 2159.84,135.43 2159.84,107.09 2202.36,64.57 2232.28,64.57 2251.57,45.28 U10.22@2271.65,45.28
$$$11: C40.2 J2.2 R63.1 U8.4 | length 266.9
  Top w7.87: J2.2@447.24,118.11 596.06,118.11 R63.1@596.06,135.83 ; R63.1@594.49,135.83 R63.1@596.06,135.83 ; U8.4@692.91,137.8 647.64,137.8 C40.2@647.64,135.83 R63.1@596.06,135.83
$$$12: R50.1 R53.1 U1.1 | length 161.1
  Top w7.87: R50.1@2673.23,198.82 2673.23,198.43 2726.38,145.28 2726.38,140.16 R53.1@2726.77,139.76 2726.77,116.93 2734.65,109.06 U1.1@2780.51,109.06
$$$13: R51.1 R52.2 U1.8 | length 87.8
  Top w7.87: R51.1@2734.25,259.84 R52.2@2780.51,259.84 ; U1.8@2780.51,223.23 R52.2@2780.51,259.84 ; R52.2@2785.43,259.84 R52.2@2780.51,259.84
$$$14: R54.1 R56.2 U2.1 | length 135.3
  Top w7.87: R54.1@2673.23,-47.64 2725.98,-47.64 R56.2@2726.77,-47.64 2726.77,-72.05 2735.43,-80.71 U2.1@2780.51,-80.71
$$$15: R55.1 R57.1 U2.8 | length 88.1
  Top w7.87: R55.1@2734.25,70.08 2780.51,70.08 R57.1@2780.51,69.29 ; U2.8@2780.51,33.46 R57.1@2780.51,69.29 ; R57.1@2785.43,70.08 2781.3,70.08 R57.1@2780.51,69.29
$$$16: R58.1 R60.1 U3.1 | length 129.3
  Top w7.87: R58.1@2673.23,-250 R60.1@2726.38,-250 2726.38,-272.05 U3.1@2780.51,-272.05
$$$17: R59.1 R61.1 U3.8 | length 95
  Top w7.87: R59.1@2734.25,-122.83 R61.1@2785.43,-122.83 2777.71,-122.98 2777.71,-123.77 2780.51,-126.57 U3.8@2780.51,-157.87
$$$18: @2_22.1 @2_23.1 R55.2 U10.40 | length 374.3
  Top w7.87: U10.40@2437.01,-104.33 2468.05,-104.33 2468.43,-103.95 2468.5,-103.94 ; 2644.88,70.08 R55.2@2675.2,70.08
  Bottom w11.81: 2468.5,-103.94 2469.29,-103.15 2469.29,-71.65 2487.4,-53.54 2597.64,-53.54 2645.67,-5.51 2645.67,69.29 2644.88,70.08
$$$19: C30.1 R42.2 U7.2 | length 315.6
  Top w7.87: R42.2@1159.45,-133.86 1185.43,-133.86 1191.34,-139.76 C30.1@1220.47,-139.76 1220.47,-133.07 1273.23,-80.32 1407.09,-80.32 1421.26,-66.14 U7.2@1421.26,-49.21
$$$20: R54.2 U10.7 | length 272.5
  Top w7.87: U10.7@2460.63,13.78 2502.76,13.78 2562.99,74.02 2603.15,74.02 2619.29,57.87 2619.29,42.52 2650.39,11.42 R54.2@2673.23,11.42
$$$21: @2_24.1 @2_25.1 R59.2 U10.1 | length 253.8
  Top w7.87: U10.1@2460.63,-80.71 2487.01,-80.71 2495.28,-85.04 ; R59.2@2675.2,-122.83 2675.2,-89.37 2675.59,-85.04
  Bottom w11.81: 2495.28,-85.04 2675.59,-85.04
$$$22: R58.2 U10.4 | length 327.6
  Top w7.87: U10.4@2460.63,-33.46 2514.57,-33.46 2532.28,-51.18 2608.66,-51.18 2640.94,-83.46 2640.94,-168.5 2662.4,-189.96 2672.24,-189.96 R58.2@2673.23,-190.94
$$$23: @2_20.1 @2_21.1 R51.2 U10.13 | length 406.4
  Top w7.87: 2399.21,117.32 2405.51,111.02 U10.13@2405.51,84.65 ; 2518.11,129.92 2539.37,151.18 2539.37,182.68 2556.69,200 2607.87,200 2619.68,211.81 2619.88,211.81 2619.88,241.93 2637.8,259.84 R51.2@2675.2,259.84
  Bottom w11.81: 2399.21,117.32 2411.81,129.92 2518.11,129.92
$$$24: D1.2 R18.2 | length 63
  Top w7.87: R18.2@1878.35,122.05 1927.17,120.47 D1.2@1927.17,106.3
$$$25: C19.2 J3.7 J3.8 R53.2 U1.9 U10.9 | length 994.5
  Top w7.87: U10.9@2460.63,45.28 2473.62,45.28 2500,71.65 2500,86.61 2515.75,102.36 2524.41,102.36 2541.73,119.68 2541.73,128.35 C19.2@2578.74,165.35 ; R53.2@2726.77,198.82 2748.03,198.82 2748.03,198.43 2760.63,185.83 U1.9@2818.9,185.83 2894.49,185.83 2931.5,148.82 2931.5,-3.94 3018.11,-90.55 J3.7@3090.55,-90.55 J3.8@3090.55,-110.24
  Top w9.84: C19.2@2578.74,165.35 2622.05,165.35 2638.58,181.89 2638.58,220.47 2646.46,228.35 2715.75,228.35 2726.77,217.32 R53.2@2726.77,198.82
$$$26: @2_10.1 @2_12.1 C19.1 D1.1 U10.11 | length 742.1
  Top w7.87: D1.1@2033.46,106.3 2042.52,106.3 2042.52,74.8 ; U10.11@2437.01,84.65 2437.01,97.62 2446.46,107.07 2462.21,107.07 2464.57,107.87 2464.57,108.66 2513.39,157.48 2513.39,221.26 2528.21,236.09 2582.55,236.09 C19.1@2578.74,236.22
  Bottom w11.81: 2042.52,74.8 2052.76,64.57 2421.26,64.57 2464.57,107.87
$$$27: @2_11.1 @2_34.1 C21.1 D2.1 U10.8 | length 744.4
  Top w7.87: 2000.79,19.68 2004.72,23.62 D2.1@2033.46,23.62 ; U10.8@2460.63,29.53 2483.86,29.53 2533.86,79.53 2565.35,111.02 2577.17,111.02 2577.95,110.24 C21.1@2578.74,110.24
  Bottom w11.81: 2000.79,19.68 2037.8,19.68 2059.06,40.94 2490.55,40.94 ; 2490.58,40.97 2490.62,41.01 2495.34,41.01 2533.86,79.53
$$$28: C21.2 J3.9 J3.10 R56.1 U2.9 U10.6 | length 769.4
  Top w7.87: U10.6@2460.63,-1.97 2514.96,-1.97 2556.3,39.37 C21.2@2578.74,39.37 ; R56.1@2726.77,11.42 2735.43,3.94 2743.31,-3.94 U2.9@2818.9,-3.94 2881.89,-3.94 3007.09,-129.13 3070.08,-129.13 J3.9@3090.55,-129.92 J3.10@3090.55,-149.61
  Top w9.84: C21.2@2578.74,39.37 2582.44,39.37 2640.71,-18.9 2710.24,-18.9 2726.77,-2.36 R56.1@2726.77,11.42
$$$29: J4.7 U10.23 | length 441.1
  Top w7.87: J4.7@1913.39,196.85 1916.12,192.91 1958.64,150.39 2059.45,150.39 2075.2,134.65 2126.77,134.65 2140.94,120.47 2140.94,98.03 2189.37,49.61 2224.41,49.61 2244.49,29.53 U10.23@2271.65,29.53
$$$30: @2_50.1 @2_51.1 @2_119.1 @2_120.1 C22.2 J3.11 J3.12 R60.2 U3.9 U10.3 | length 814.8
  Top w7.87: U10.3@2460.63,-49.21 2497.64,-49.21 2535.04,-86.61 C22.2@2578.74,-86.61 ; R60.2@2726.38,-190.94 2814.57,-190.94 U3.9@2817.72,-194.09 ; U3.9@2818.9,-195.28 U3.9@2817.72,-194.09 ; 2905.51,-195.28 2889.76,-195.28 2888.58,-194.09 U3.9@2817.72,-194.09 ; 3015.75,-195.28 3031.5,-195.28 3057.48,-169.29 J3.11@3090.55,-169.29 J3.12@3090.55,-188.98
  Top w9.84: C22.2@2578.74,-86.61 2603.15,-86.61 2622.05,-105.51 2622.05,-201.57 2643.31,-222.83 2710.24,-222.83 2726.77,-206.3 2726.77,-191.34 R60.2@2726.38,-190.94
  Bottom w7.87: 2905.51,-195.28 3015.75,-195.28
$$$31: D2.2 R17.2 | length 66.9
  Top w7.87: R17.2@1878.35,41.73 1927.17,41.73 D2.2@1927.17,23.62
$$$32: D3.2 R16.2 | length 300.9
  Top w7.87: R16.2@1878.35,-11.81 1893.31,-26.77 2002.76,-26.77 2026.77,-50.79 2026.77,-137.01 2040.35,-150.59 2069.88,-150.59 D3.2@2070.87,-151.57
$$$33: R68.1 U7.11 | length 165.4
  Top w7.87: U7.11@1537.4,3.94 1547.24,3.94 1566.14,-14.96 1631.5,-14.96 1660.63,14.17 1660.63,28.74 R68.1@1657.48,21.65
$$$34: C34.2 U10.26 | length 84.1
  Top w7.87: C34.2@2194.88,0 2240.16,0 2257.87,-17.72 U10.26@2271.65,-17.72
$$$35: R43.1 R44.2 U10.15 | length 132.7
  Top w7.87: U10.15@2374.02,84.65 2374.02,130.65 ; 2373.99,130.68 2373.99,133.83 R44.2@2393.7,153.54 2393.7,198.99 2397.55,202.84 2401.57,202.84 R43.1@2401.57,203.54
$$$36: C33.2 R43.2 | length 62.5
  Top w7.87: C33.2@2340.55,259.06 2344.09,262.59 2401.46,262.59 R43.2@2401.57,262.6
$$$37: @2_15.1 @2_139.1 R45.2 U7.27 | length 481.3
  Top w7.87: 1324.41,66.93 1325.2,66.93 1340.94,51.18 U7.27@1383.86,51.18 ; 1690.55,19.68 1690.63,19.35 1690.96,19.68 R45.2@1710.63,19.68
  Bottom w9.84: 1324.41,66.93 1486.61,66.93 1497.64,77.95 1608.66,77.95 1666.93,19.68 1690.55,19.68
$$$38: @2_14.1 @2_138.1 R46.2 U7.26 | length 431.7
  Top w7.87: 1346.46,95.28 1346.85,94.88 1346.85,80.71 1360.63,66.93 U7.26@1383.86,66.93 ; 1690.55,70.87 R46.2@1710.63,70.87
  Bottom w9.84: 1346.46,95.28 1624.8,95.28 1648.03,72.05 1689.37,72.05 1690.55,70.87
$$$39: @2_27.1 @2_29.1 R45.1 U10.19 | length 616.9
  Top w7.87: R45.1@1769.69,19.68 1791.34,19.68 ; 2296.85,112.6 2311.02,98.43 U10.19@2311.02,84.65
  Bottom w11.81: 1791.34,19.68 1825.2,53.54 1968.5,53.54 2011.02,96.06 2122.83,96.06 2133.86,85.04 2283.46,85.04 2296.85,98.43 2296.85,112.6
$$$40: @2_26.1 @2_28.1 R46.1 U10.20 | length 561.6
  Top w7.87: R46.1@1769.69,70.87 1769.68,76.38 1791.34,76.38 ; 2266.14,105.51 2266.54,105.51 2287.4,84.65 U10.20@2295.28,84.65
  Bottom w11.81: 1791.34,76.38 1952.36,76.38 1993.31,117.32 2137.8,117.32 2148.62,106.5 2265.16,106.5 2266.14,105.51
$$$41: @2_46.1 @2_47.1 @2_48.1 @2_49.1 @2_52.1 @2_53.1 C6.1 C7.1 C18.2 IC3.3 J2.3 R49.2 U1.2 U1.3 U1.4 U1.10 U2.2 U2.3 U2.4 U2.10 U3.2 U3.3 U3.4 U3.10 U8.21 U8.22 | length 3681.8
  Top w7.87: J2.3@447.24,157.48 532.28,157.48 531.5,156.69 C6.1@531.5,149.61 549.61,167.72 622.05,167.72 622.05,168.5 633.86,180.32 R49.2@633.86,198.03 651.18,198.03 651.18,198.82 660.63,208.27 660.63,218.11 704.72,262.2 744.88,262.2 758.07,249.02 757.87,248.82 U8.22@757.87,222.44 U8.21@777.56,222.44 777.56,255.91 794.49,272.83 795.67,272.83 796.85,274.02 1000,274.02 1008.66,265.35 C18.2@1008.66,241.73 1096.85,241.73 IC3.3@1098.43,240.16 ; C7.1@2082.68,240.16 2129.92,192.91 2144.8,192.91 2144.89,192.82 2145.67,192.91 ; U3.2@2806.1,-272.05 U3.3@2831.69,-272.05 U3.4@2857.28,-272.05 2906.3,-272.05 2955.12,-223.23 2955.12,-153.54 2955.12,-151.97 2882.68,-79.53 ; U2.2@2806.1,-80.71 U2.3@2831.69,-80.71 ; U1.2@2806.1,109.06 U1.3@2831.69,109.06 ; U2.10@2830.71,-51.18 2831.69,-52.17 U2.3@2831.69,-80.71 ; U1.10@2830.71,138.58 2831.69,137.6 U1.3@2831.69,109.06 ; 2882.68,-62.2 2882.68,-79.53 ; 2885.83,118.11 2885.83,118.04 2885.83,117.28 2877.6,109.06 U1.4@2857.28,109.06 U1.3@2831.69,109.06 ; U2.3@2831.69,-80.71 U2.4@2857.28,-80.71 2882.68,-80.71 2883.27,-80.12 2883.07,-79.92 2882.68,-79.53
  Top w11.81: U3.10@2830.71,-242.52 2831.69,-243.5 U3.3@2831.69,-272.05
  Top w15.75: IC3.3@1098.43,240.16 1110.24,259.84 1125.98,275.59 1555.12,275.59 1591.34,239.37 1761.42,239.37 1796.85,274.8 2082.38,274.8 2084.1,273.08 2084.1,272.29 2083.17,271.36 2083.17,244.1 2083.12,244.06 C7.1@2082.68,240.16
  Bottom w7.87: 2882.68,-62.2 2855.12,-62.2 2838.58,-45.67 2838.58,88.98 2867.72,118.11 2885.83,118.11 2885.83,117.32 2885.83,137.8
  Bottom w15.75: 2145.67,192.91 2145.67,155.12 2162.99,137.8 2357.48,137.8 2377.17,157.48 2544.88,157.48 2573.23,185.83 2844.09,185.83 2885.83,144.09 2885.83,137.8
$$$42: @2_30.1 @2_37.1 R30.2 R33.2 U10.30 | length 397.8
  Top w7.09: 2234.65,-151.18 2243.31,-142.52 2243.31,-120.47 2271.65,-92.13 U10.30@2271.65,-80.71
  Top w7.87: R30.2@2055.12,-263.39 2103.15,-263.39 2103.15,-259.84 ; 2103.15,-214.96 2103.15,-259.84 ; R33.2@2135.83,-259.84 2103.15,-259.84
  Bottom w7.87: 2103.15,-214.96 2103.15,-172.44 2124.41,-151.18 2234.65,-151.18
$$$43: Q1.1 R4.2 R14.2 | length 177.9
  Top w7.87: R14.2@3537.01,-69.69 3537.01,-122.83 3580.71,-166.54 Q1.1@3580.71,-167.32 3580.71,-220.38 3589.73,-220.38 R4.2@3589.76,-220.47